# Altium PCB PCB1.PCBDOC
Units mm, origin at the board's own origin, x right, y up, seen from the top; angles counter-clockwise.
Board outline 152.4 x 101.6 mm, 2 copper layers (Top Layer, Bottom Layer); 24 components, 35 nets, 130 pads, 251 vias.
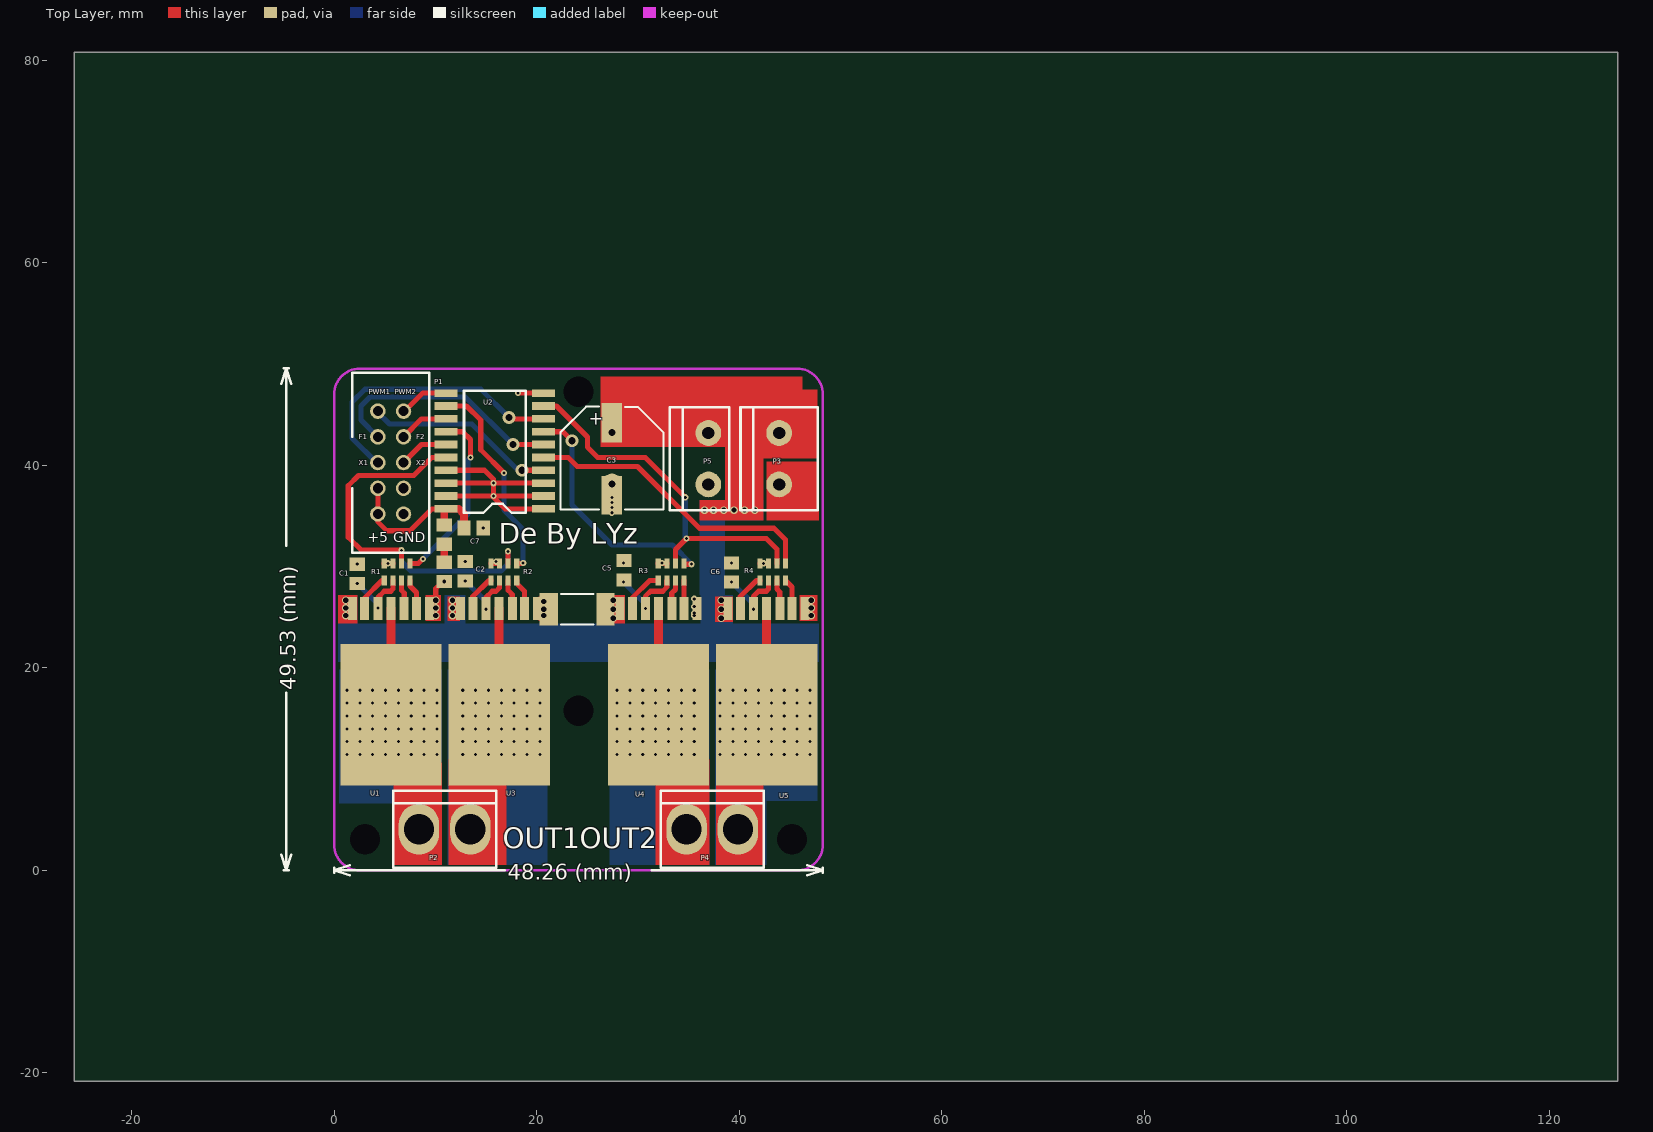
[diagram p0: Top Layer view]
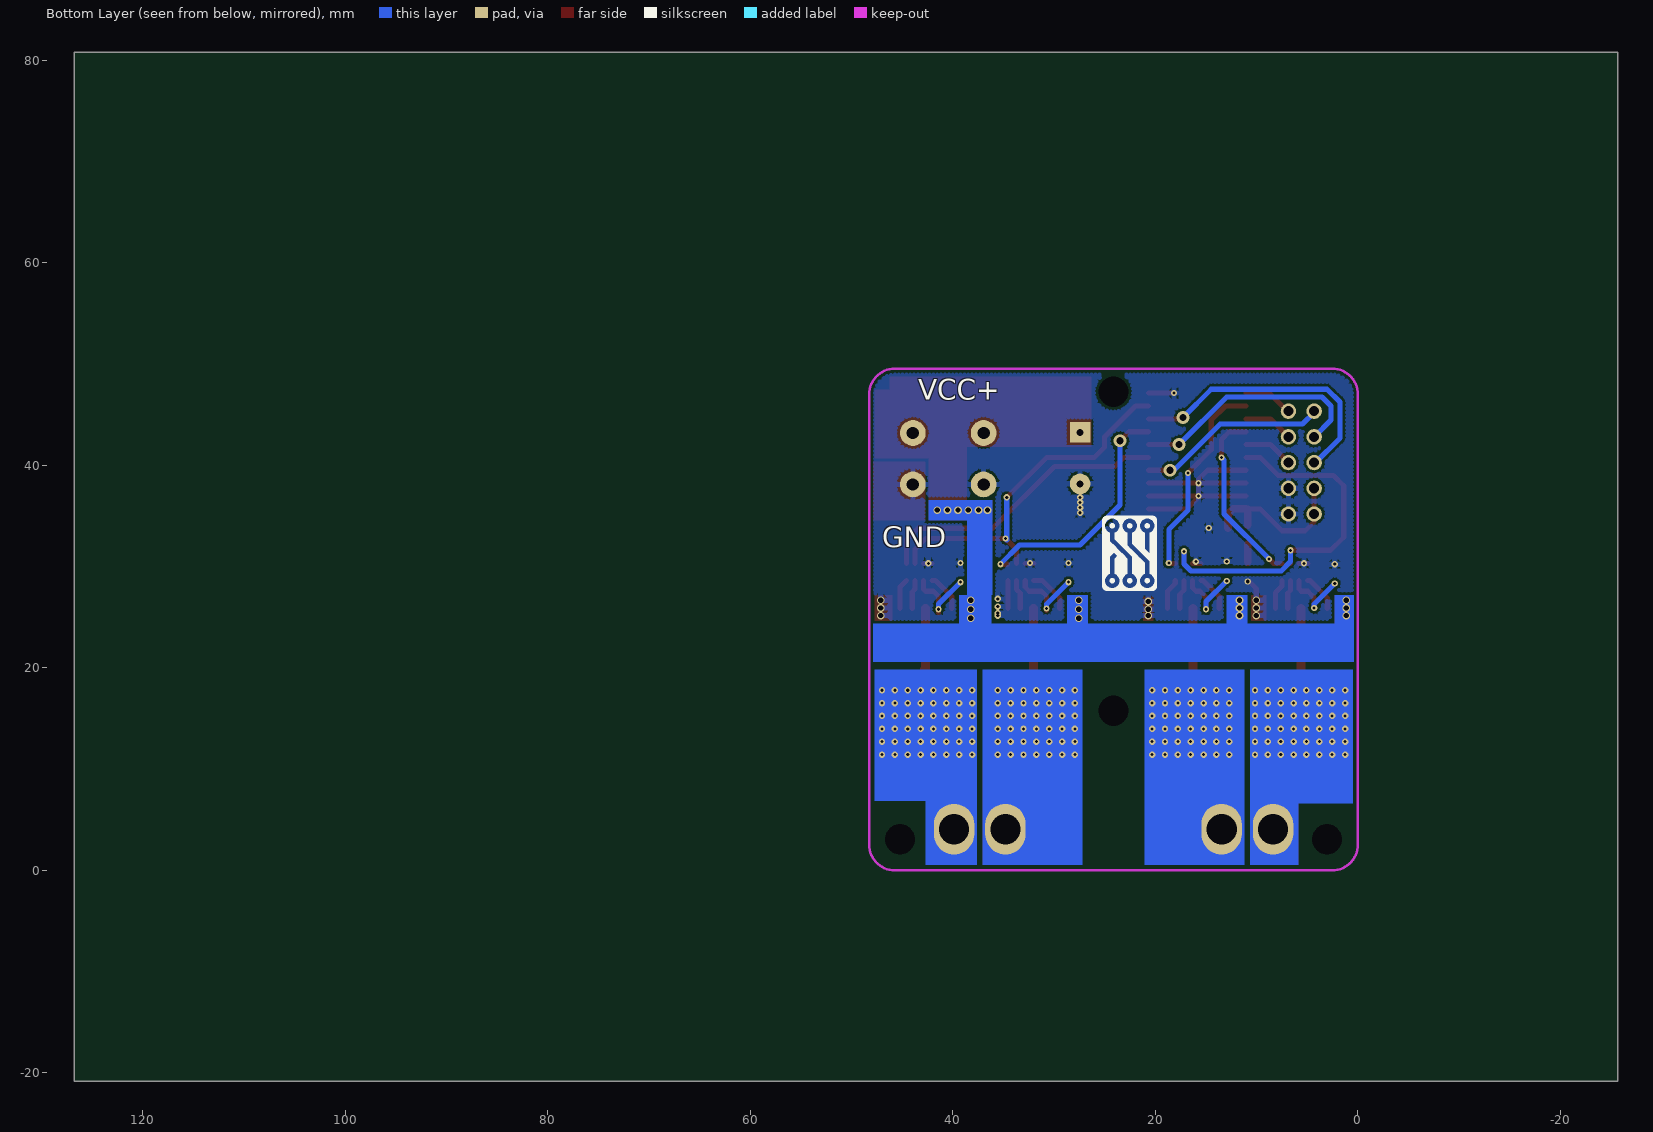
[diagram p1: Bottom Layer view, seen from below]

## Layer stack, top to bottom
Top Layer: signal copper 0.0356
Dielectric: dielectric 0.32, FR-4, Dk 4.8
Bottom Layer: signal copper 0.0356

## Board outline
-25.654,-20.828 126.746,-20.828 126.746,80.772 -25.654,80.772

## Design rules (kind name [scope] priority, off if disabled: settings)
Clearance [All] p1: gap=0.254
ComponentClearance [All] p1: gap=0.254 collisioncheckmode=3 verticalgap=0.254
PolygonConnect [All] p1: connectstyle=Relief reliefconductorwidth=0.508 reliefentries=4 polygonreliefangle="90 Angle"
RoutingVias [All] p1: holewidth=0.711 width=1.27 viastyle="Through Hole" minholewidth=0.305 minwidth=0.61 maxholewidth=12.7 maxwidth=127
SolderMaskExpansion [All] p1: expansion=0.102
TestPointUsage [All] p1: valid=0 allowmultiple=FALSE
Testpoint [All] p1: side=15 testpointundercomponent=TRUE minsize=1.016 maxsize=2.54 preferedsize=1.524 minholesize=0 maxholesize=1.016 preferedholesize=0.813 testpointgrid=0.025 style=1023 order=0-112345678
Width [All] p1: maxlimit=2539.975 minlimit=0.254 preferedwidth=0.508
18 further rules are at their usual default settings.

## Classes and differential pairs
component class motordriver: C1 C2 C3 C4 C5 C6 C7 C? P1 P2 P3 P4 R1 R2 R3 R4 U1 U2 U3 U4 U5

## Components (designator, comment, footprint, x,y, rotation, side; value= is the part's Value field where it differs from the comment)
C1 "104" M0805 2.286,30.226 r270 top
C2 "104" M0805 12.954,30.48 r270 top
C3 "Cap Pol1" C2 27.432,40.64 r180 top
C5 "104" M0805 28.626,30.582 r270 top
C6 "104" M0805 39.243,30.353 r270 top
C7 "104" M0805 12.827,33.807 r0 top
P1 "Header 5X2" ISP 4.318,45.339 r0 top
P2 "Header 2" 2P 10.922,4.064 r0 top
P3 "Header 2" 2p#1 43.942,40.64 r90 top
P4 "Header 2" 2p#2 37.338,4.064 r0 top
P5 "Header 2" 2p#1 36.957,40.64 r90 top (schematic designator P3)
R1 "A" 排阻 6.223,29.464 r180 top
R2 "A" 排阻 16.764,29.464 r180 top
R3 "A" 排阻 33.274,29.464 r180 top
R4 "A" 排阻 43.307,29.464 r180 top
U1 "bts7960" bts7960 9.906,20.828 r0 top
U2 "74ALS244B" 244 14.859,41.402 r90 top
U3 "bts7960" bts7960 20.574,20.828 r0 top
U4 "bts7960" bts7960 36.322,20.828 r0 top
U5 "bts7960" bts7960 46.99,20.828 r0 top
? "Comment" LOOG 22.606,31.496 r180 top
? "Comment" 6332[2512] 24.003,25.781 r0 top
? "Comment" 2012[0805] 10.871,29.464 r90 top
? "Comment" 2012[0805] 10.871,33.147 r90 top

## Footprints (in the part's own frame and the unit in brackets; to place one, negate y for a bottom-side part, rotate by r counter-clockwise, add the part's x,y. Pads: shape width x height; smd on the part's side, far side on the other; paste and mask are expansions set on the pad)
2P [mm]
  oval 4x5 hole 3: 1(-2.54,0) 2(2.54,0)
  silkscreen extent -5.08,-3.81 5.08,3.81
2p#1 [mil]
  round 100 hole 48: 1(-100,0) 2(100,0)
  silkscreen extent -200,-150 200,150
2p#2 [mil]
  oval 157.48x196.85 hole 118.11: 1(-100,0) 2(100,0)
  silkscreen extent -200,-150 200,150
244 [mil]
  rect 30x90 smd: 1(-225,-228.74) 2(-175,-228.74) 3(-125,-228.74) 4(-75,-228.74) 5(-25,-228.74) 6(25,-228.74) 7(75,-228.74) 8(125,-228.74) 9(175,-228.74) 10(225,-228.74) 11(225,150) 12(175,150) 13(125,150) 14(75,150) 15(25,150) 16(-25,150) 17(-75,150) 18(-125,150) 19(-175,150) 20(-225,150)
2012[0805] [mm] "Chip Resistor; Body 2.0 x 1.3 mm (LxW typ)"
  rect 1.3x1.5 smd: 1(-0.95,0) 2(0.95,0)
6332[2512] [mm] "Chip Resistor; Body 6.3 x 3.2 mm (LxW typ)"
  rect 1.8x3.2 smd: 1(-2.8,0) 2(2.8,0)
  silkscreen extent -1.6,-1.5 1.6,1.5
bts7960 [mil]
  rect 35x90 smd: 1(-18.9,198.11) 2(-70.08,198.11) 3(-117.32,198.11) 4(-168.5,198.11) 5(-219.68,198.11) 6(-270.87,198.11) 7(-318.11,198.11)
  rect 393.7x551.18 smd: 8(-168.5,-215.28)
C2 [mil]
  rect 80x80 hole 27.56: 1(0,-102.5)
  rect 80x150 smd: 1(0,-142.5) 2(0,142.5)
  round 80 hole 27.56: 2(0,97.5)
  silkscreen extent -200,-202 200,198
ISP [mil]
  round 60 hole 39.37: 1(0,0) 2(100,0) 3(0,-100) 4(100,-100) 5(0,-200) 6(100,-200) 7(0,-300) 8(100,-300) 9(0,-400) 10(100,-400)
  silkscreen extent -100,-550 200,150
LOOG [mm]
M0805 [mm]
  rect 1.3x1.5 smd: 1(0,0) 2(1.9,0)
排阻 [mm]
  rect 0.5x1 smd: 1(-1.27,-0.847) 2(-1.27,0.847) 3(-0.423,-0.847) 4(-0.423,0.847) 5(0.423,-0.847) 6(0.423,0.847) 7(1.27,-0.847) 8(1.27,0.847)

## Part data
C1 C2 C5 C6 C7: library part Cap, "Capacitor"
C3: "Polarized Capacitor (Radial)"
P1: "Header, 5-Pin, Dual row"
P2 P3 P4 P5: "Header, 2-Pin"
R1 R2 R3 R4: library part R1

## Free pads (board coordinates)
  round 5 on Top Overlay: 0(3.048,3.048) 0(24.13,15.748) 0(45.212,3.048)
  round 0 hole 3: 0(3.048,3.048) 0(24.13,15.748) 0(24.13,47.244) 0(45.212,3.048)
  round 1 on Top Overlay: 0(18.034,36.322)

## Via types
v1: diameter 0.635, hole 0.305, Top Layer to Bottom Layer, 191 vias
v2: diameter 0.61, hole 0.305, Top Layer to Bottom Layer, 28 vias
v3: diameter 0.762, hole 0.508, Top Layer to Bottom Layer, 27 vias
v4: diameter 1.27, hole 0.711, Top Layer to Bottom Layer, 4 vias
v5: diameter 0.635, hole 0.381, Top Layer to Bottom Layer, 1 vias

## Nets (pads, with @x,y where several pads share a name; then routed paths per layer and width w, separated by ;. In a path a pad name is that pad's centre, name@x,y a point inside that pad or via, vN(x,y) a via of type N, cw(c..) or ccw(c..) an arc to the next point about the centre after c; other vN are vias at no path point)
5V: ?.2@10.871,34.097 C7.1 P1.7 P1.9 U2.20 | length 16.2
  Top Layer w0.508: P1.7 4.318,34.417 5.207,33.528 7.493,33.528 9.652,35.687 U2.20
  Top Layer w0.762: ?.2@10.871,34.097 U2.20@10.871,35.636 ; U2.20 12.319,35.687 12.827,35.179 C7.1
BAT: ?.2@26.803,25.781 C3.1 P3.2 P5.2 U1.7 U3.7 U4.7 U5.7
  other v3: 27.559,24.892 38.227,24.892 1.143,25.146 11.684,25.146 27.559,25.781 38.227,25.781 1.143,25.908 11.684,25.908 1.143,26.67 11.684,26.67 27.559,26.67 38.227,26.67 36.576,35.56 37.465,35.56 38.481,35.56 39.497,35.56 40.513,35.56 41.529,35.56
ENL1: P1.3 U2.6 | length 24.4
  Top Layer w0.508: v4(17.653,42.037) U2.6
  Bottom Layer w0.508: P1.3@4.318,42.418 P1.3 2.667,44.45 2.667,45.847 3.556,46.736 12.954,46.736 v4(17.653,42.037)
ENL2: P1.5 U2.8 | length 27.7
  Top Layer w0.508: v4(17.272,44.704) 17.399,44.577 U2.8
  Bottom Layer w0.508: P1.5 4.191,40.259 1.778,42.672 1.778,46.228 3.048,47.498 14.478,47.498 v4(17.272,44.704)
ENL_1: R1.1 U2.14 | length 18
  Top Layer w0.508: R1.1 8.34,30.311 v2(8.763,30.734) ; U2.14 12.7,43.307 13.462,42.545 v2(13.462,40.767)
  Bottom Layer w0.508: v2@8.738,30.709 13.208,35.179 13.208,40.513 v2(13.462,40.767)
ENL_2: R2.1 U2.12 | length 20.5
  Top Layer w0.508: U2.12 13.081,45.847 14.478,44.45 14.478,41.529 v2(16.764,39.243) ; R2.1 18.627,30.311 v2(18.669,30.353)
  Bottom Layer w0.508: v2(16.764,39.243) 16.764,35.56 18.669,33.655 v2(18.669,30.353)
ENR1: P1.4 U2.13 | length 4.9
  Top Layer w0.508: P1.4 8.636,44.577 U2.13
ENR2: P1.6 U2.15 | length 4.9
  Top Layer w0.508: P1.6 8.636,42.037 U2.15
ENR_1: R3.1 U2.7 | length 24.5
  Top Layer w0.508: U2.7 22.606,43.307 v4(23.495,42.418) ; R3.1@34.629,30.226 v2(35.306,30.226)
  Bottom Layer w0.508: v4(23.495,42.418) 23.495,36.068 27.432,32.131 33.401,32.131 v2(35.306,30.226)
ENR_2: R4.1 U2.5 | length 29.6
  Top Layer w0.508: U2.5 23.114,40.767 24.003,39.878 29.972,39.878 36.068,33.782 43.434,33.782 44.577,32.639 R4.1
GND: ?.1@10.871,28.514 ?.1@21.203,25.781 C1.1 C2.1 C3.2 C5.1 C6.1 C7.2 P1.8 P1.10 P3.1 P5.1 R1.5 R1.7 R2.5 R2.7 R3.5 R3.7 R4.5 R4.7 U1.1 U2.1 U2.2 U2.3 U2.10 U2.17 U2.18 U2.19 U3.1 U4.1 U5.1 | length 39.5
  Top Layer w0.508: R1.7 R1.5 ; v3(10.033,26.67) 10.033,27.813 ?.1@10.734,28.514 ; U2.19 U2.2 ; U2.18 U2.3 ; U2.17 14.859,39.497 15.748,38.608 15.748,36.83 16.891,35.687 U2.1 ; R2.7 R2.5 ; v2(18.161,47.117) U2.10 ; R3.7 R3.5 ; R4.7 R4.5
  other v1: 35.56,25.146 35.56,25.4 35.56,26.035 35.56,26.797 16.002,30.48 27.432,35.306 27.432,35.814 27.432,36.322 27.432,36.83
  other v2: 2.286,30.226 5.334,30.311 42.418,30.311 28.575,30.353 32.385,30.353 39.243,30.353 12.954,30.48 14.727,33.807 15.748,36.957 15.748,38.227
  other v3: 10.033,25.146 20.701,25.146 47.117,25.146 20.701,25.781 10.033,25.908 47.117,25.908 20.701,26.543 47.117,26.67
  other v5: 10.871,28.514
IN_1: R1.2 U1.2 | length 3
  Top Layer w0.508: R1.2 7.493,28.067 8.126,27.434 U1.2
IN_2: R2.2 U3.2 | length 3.1
  Top Layer w0.508: R2.2 18.034,28.321 18.794,27.561 U3.2
IN_3: R3.2 U4.2 | length 2.8
  Top Layer w0.508: U4.2@34.544,25.862 R3.2
IN_4: R4.2 U5.2 | length 3
  Top Layer w0.508: R4.2 45.21,27.984 U5.2
INH_1: R1.4 U1.3 | length 2.9
  Top Layer w0.508: R1.4 6.646,27.644 6.926,27.364 U1.3
INH_2: R2.4 U3.3 | length 2.9
  Top Layer w0.508: R2.4 17.187,27.644 17.594,27.237 U3.3
INH_3: R3.4 U4.3 | length 2.9
  Top Layer w0.508: U4.3 33.342,27.373 33.697,27.728 R3.4
INH_4: R4.4 U5.3 | length 2.9
  Top Layer w0.508: R4.4 43.73,27.771 44.01,27.491 U5.3
IS_1: R1.8 U1.6 | length 3.7
  Top Layer w0.508: U1.6 3.026,26.902 4.741,28.617 R1.8
IS_2: R2.8 U3.6 | length 3.6
  Top Layer w0.508: U3.6 13.694,27.029 15.282,28.617 R2.8
IS_3: R3.8 U4.6 | length 4.3
  Top Layer w0.508: U4.6 29.442,26.902 31.157,28.617 R3.8
IS_4: R4.8 U5.6 | length 3.8
  Top Layer w0.508: U5.6 40.11,27.029 41.698,28.617 R4.8
OUT1: P2.1 U1.4 U1.8 | length 8.7
  Top Layer w0.889: U1.8@5.461,17.272 5.626,17.437 U1.4
  other v1: 1.27,11.43 2.54,11.43 3.81,11.43 5.08,11.43 6.35,11.43 7.62,11.43 8.89,11.43 10.16,11.43 1.27,12.7 2.54,12.7 3.81,12.7 5.08,12.7 6.35,12.7 7.62,12.7 8.89,12.7 10.16,12.7 1.27,13.97 2.54,13.97 3.81,13.97 5.08,13.97 6.35,13.97 7.62,13.97 8.89,13.97 10.16,13.97 1.27,15.24 2.54,15.24 3.81,15.24 5.08,15.24 6.35,15.24 7.62,15.24 8.89,15.24 10.16,15.24 1.27,16.51 2.54,16.51 3.81,16.51 5.08,16.51 6.35,16.51 7.62,16.51 8.89,16.51 10.16,16.51 1.27,17.78 2.54,17.78 3.81,17.78 5.08,17.78 6.35,17.78 7.62,17.78 8.89,17.78 10.16,17.78
OUT2: P2.2 U3.4 U3.8 | length 9.4
  Top Layer w0.889: U3.8@16.129,16.51 16.294,16.675 U3.4
  other v1: 12.7,11.43 13.97,11.43 15.24,11.43 16.51,11.43 17.78,11.43 19.05,11.43 20.32,11.43 12.7,12.7 13.97,12.7 15.24,12.7 16.51,12.7 17.78,12.7 19.05,12.7 20.32,12.7 12.7,13.97 12.7,13.97 13.97,13.97 15.24,13.97 16.51,13.97 17.78,13.97 19.05,13.97 20.32,13.97 12.7,15.24 13.97,15.24 15.24,15.24 16.51,15.24 17.78,15.24 19.05,15.24 20.32,15.24 12.7,16.51 13.97,16.51 15.24,16.51 16.51,16.51 17.78,16.51 19.05,16.51 20.32,16.51 12.7,17.78 13.97,17.78 15.24,17.78 16.51,17.78 17.78,17.78 19.05,17.78 20.32,17.78
OUT3: P4.1 U4.4 U4.8 | length 8.8
  Top Layer w0.889: U4.4 32.042,17.361 U4.8@32.258,17.145
  other v1: 27.94,11.43 29.21,11.43 30.48,11.43 31.75,11.43 33.02,11.43 34.29,11.43 35.56,11.43 27.94,12.7 29.21,12.7 30.48,12.7 31.75,12.7 33.02,12.7 34.29,12.7 35.56,12.7 27.94,13.97 29.21,13.97 30.48,13.97 31.75,13.97 33.02,13.97 34.29,13.97 35.56,13.97 27.94,15.24 29.21,15.24 30.48,15.24 31.75,15.24 33.02,15.24 34.29,15.24 35.56,15.24 27.94,16.51 29.21,16.51 30.48,16.51 31.75,16.51 33.02,16.51 34.29,16.51 35.56,16.51 27.94,17.78 29.21,17.78 30.48,17.78 31.75,17.78 33.02,17.78 34.29,17.78 35.56,17.78
OUT4: P4.2 U5.4 U5.8 | length 6.1
  Top Layer w0.889: U5.4 42.71,19.901 U5.8@42.799,19.812
  other v1: 38.1,11.43 39.37,11.43 40.64,11.43 41.91,11.43 43.18,11.43 44.45,11.43 45.72,11.43 46.99,11.43 38.1,12.7 39.37,12.7 40.64,12.7 41.91,12.7 43.18,12.7 44.45,12.7 45.72,12.7 46.99,12.7 38.1,13.97 38.1,13.97 39.37,13.97 40.64,13.97 41.91,13.97 43.18,13.97 44.45,13.97 45.72,13.97 46.99,13.97 38.1,15.24 39.37,15.24 40.64,15.24 41.91,15.24 43.18,15.24 44.45,15.24 45.72,15.24 46.99,15.24 38.1,16.51 39.37,16.51 40.64,16.51 41.91,16.51 43.18,16.51 44.45,16.51 45.72,16.51 46.99,16.51 38.1,17.78 39.37,17.78 40.64,17.78 41.91,17.78 43.18,17.78 44.45,17.78 45.72,17.78 46.99,17.78
PWM1: P1.1 U2.4 | length 18.8
  Top Layer w0.508: v4(18.542,39.497) U2.4
  Bottom Layer w0.508: P1.1 4.318,45.212 5.461,44.069 13.589,44.069 18.161,39.497 v4(18.542,39.497)
PWM2: P1.2 U2.11 | length 4.9
  Top Layer w0.508: P1.2 6.985,45.339 8.763,47.117 U2.11
PWM_1: R1.3 R2.3 U2.16 | length 37.7
  Top Layer w0.508: R1.3 v2@6.646,31.589 ; v2(6.655,31.598) 2.692,31.598 1.397,32.893 1.397,37.973 2.413,38.989 7.874,38.989 9.652,40.767 U2.16 ; R2.3 v2@17.187,31.479
  Bottom Layer w0.508: v2(6.655,31.598) 6.655,30.48 7.569,29.566 16.485,29.566 17.17,30.251 v2(17.17,31.496)
PWM_2: R3.3 R4.3 U2.9 | length 36.2
  Top Layer w0.508: U2.9 21.971,45.847 25.019,42.799 25.019,41.783 26.035,40.767 30.734,40.767 v2(34.671,36.83) ; R3.3 33.697,31.665 v2(34.798,32.766) 42.672,32.766 43.73,31.708 R4.3
  Bottom Layer w0.508: v2@34.671,32.639 v2(34.671,36.83)
SR_1: C1.2 R1.6 U1.5 | length 7
  Top Layer w0.508: U1.5 4.326,26.932 4.953,27.559 5.588,27.559 5.8,27.771 R1.6
  Bottom Layer w0.508: v2(2.286,28.326) 4.318,26.294 v2(4.318,25.908)
SR_2: C2.2 R2.6 U3.5 | length 7.2
  Top Layer w0.508: U3.5 14.994,26.932 15.621,27.559 16.002,27.559 16.341,27.898 R2.6
  Bottom Layer w0.508: v2(12.954,28.58) 14.986,26.548 v2(14.986,25.781)
SR_3: C5.2 R3.6 U4.5 | length 8
  Top Layer w0.508: U4.5@30.734,25.654 30.734,27.051 31.242,27.559 32.45,27.559 32.851,27.959 R3.6
  Bottom Layer w0.508: v2(28.575,28.448) 30.742,26.281 v2(30.742,25.86)
SR_4: C6.2 R4.6 U5.5 | length 7.8
  Top Layer w0.508: U5.5@41.402,25.4 41.402,27.051 41.91,27.559 42.672,27.559 42.884,27.771 R4.6
  Bottom Layer w0.508: v2(39.243,28.448) 41.402,26.289 v2(41.402,25.781)
pads on no net: ?.1@10.871,32.197 ?.2@10.871,30.414
copper on no net: | length 1.8
  Top Layer w0.762: 10.871,30.414 10.871,32.197

## Polygon pours and split planes (outlines as drawn)
GND on Bottom Layer "Top Layer-No Net" (hatched 90Degree grid 0 track 0.381, remove dead copper, pour order 1000): 0,49.53 0,0 48.26,0 48.26,49.53 0,49.53

## Keep-outs
Keep-Out Layer:
  lines w0.254: 0,2.54 ccw(c2.54,2.54) 2.54,0 45.72,0 ccw(c45.72,2.54) 48.26,2.54 48.26,46.99 ccw(c45.72,46.99) 45.72,49.53 2.54,49.53 ccw(c2.54,46.99) 0,46.99 0,2.54

## Other copper
Top Layer:
  rectangle net GND: 42.672,34.544 47.879,40.386
  rectangle net BAT: 41.91,40.64 47.752,47.498
  rectangle net BAT: 0.381,24.384 2.286,27.178
  rectangle net BAT: 36.068,34.544 42.418,36.576
  rectangle net BAT: 38.608,34.544 42.418,44.45
  rectangle net OUT4: 37.719,0.508 42.418,9.144
  rectangle net OUT3: 31.75,0.508 37.084,10.922
  rectangle net OUT2: 11.303,0.508 17.018,10.922
  rectangle net OUT1: 5.842,0.508 10.668,10.668
  rectangle net BAT: 26.289,41.783 46.228,48.768
  rectangle net GND: 9.017,24.638 10.541,27.178
  rectangle net BAT: 11.176,24.638 12.446,27.051
  rectangle net GND: 20.193,24.638 21.209,27.051
  rectangle net BAT: 26.67,24.384 28.702,27.178
  rectangle net BAT: 37.592,24.511 39.37,27.051
  rectangle net GND: 45.974,24.638 47.752,27.178
Bottom Layer:
  rectangle net OUT4: 37.592,0.508 42.672,8.128
  rectangle net OUT1: 5.842,0.508 10.668,9.144
  rectangle net BAT: 36.068,34.544 42.418,36.576
  rectangle net BAT: 36.068,27.178 38.608,36.576
  rectangle net BAT: 36.195,22.86 39.37,27.178
  rectangle net BAT: 26.67,23.368 28.702,27.178
  rectangle net BAT: 10.922,23.622 12.954,27.178
  rectangle net BAT: 0.381,23.114 2.286,27.178
  rectangle net OUT1: 0.508,6.604 10.668,19.812
  rectangle net OUT2: 11.176,0.508 21.082,19.812
  rectangle net OUT3: 27.178,0.508 37.084,19.812
  rectangle net OUT4: 37.592,6.858 47.752,19.812
  rectangle net BAT: 0.381,20.574 47.879,24.384

## Silkscreen, mask and mechanical layers (free items; w line width, h text height)
Top Overlay:
  lines w0.254: -5.232,1.547 -4.724,0.023 ; -5.232,48.029 -4.724,49.553 ; -4.978,0.023 -4.47,0.023 ; -4.978,49.553 -4.47,49.553 ; -4.724,17.526 -4.724,0.023 ; -4.724,32.05 -4.724,49.553 ; -4.216,1.547 -4.724,0.023 ; -4.216,48.029 -4.724,49.553 ; 0,-0.254 0,0.254 ; 1.524,-0.508 0,0 ; 1.524,0.508 0,0 ; 16.868,0 0,0 ; 31.392,0 48.26,0 ; 46.736,-0.508 48.26,0 ; 46.736,0.508 48.26,0 ; 48.26,-0.254 48.26,0.254 ; 12.827,35.306 14.732,35.306 15.621,36.195 16.637,36.195 17.526,35.306 18.923,35.306 18.923,47.371 12.827,47.371 12.827,35.306
  text "PWM1" at 3.429,46.99 h0.51
  text "PWM2" at 5.969,46.99 h0.51
  text "F1" at 2.413,42.545 h0.51
  text "F2" at 8.128,42.545 h0.51
  text "X1" at 2.413,40.005 h0.51
  text "X2" at 8.128,40.005 h0.51
  text "+5" at 3.302,32.385 h1.02
  text "GND" at 5.842,32.385 h1.02
  text "De By LYz" at 16.256,32.258 h2.03
  text "49.53 (mm)" at -3.81,17.78 h1.52 r90
  text "OUT1" at 16.637,2.159 h2.03
  text "OUT2" at 24.257,2.159 h2.03
  text "48.26 (mm)" at 17.122,-0.914 h1.52
Bottom Overlay:
  text "VCC+" at 43.434,46.482 h2.03
  text "GND" at 46.99,31.877 h2.03
Top Solder:
  rectangle: 43.561,36.195 46.99,39.751
  rectangle: 39.751,41.275 47.371,44.958
  lines w1.27: 37.084,35.56 41.529,35.56 ; 40.386,35.56 40.386,43.18
Bottom Solder:
  rectangle: 0.762,10.922 10.668,18.288
  rectangle: 12.192,10.922 20.828,18.288
  rectangle: 27.432,10.922 36.068,18.288
  rectangle: 37.592,10.922 47.498,18.288
  lines w1.27: 1.143,26.67 1.143,23.241 1.778,22.606 46.736,22.606 ; 11.684,22.606 11.684,26.67 ; 27.559,22.733 27.559,26.67 ; 37.338,23.368 37.338,35.433 37.465,35.56 41.529,35.56

## Text inside footprints (layer, text, board x,y; h text height)
C3: Top Overlay "+" at 25.146,45.148 h1.27 r180